# Altium PCB Tactical_LED_Light.PcbDoc
Units mm, origin at the board's own origin, x right, y up, seen from the top; angles counter-clockwise.
Board outline 27 x 24 mm, 2 copper layers (Top Layer, Bottom Layer); 28 components, 15 nets, 118 pads, 45 vias.
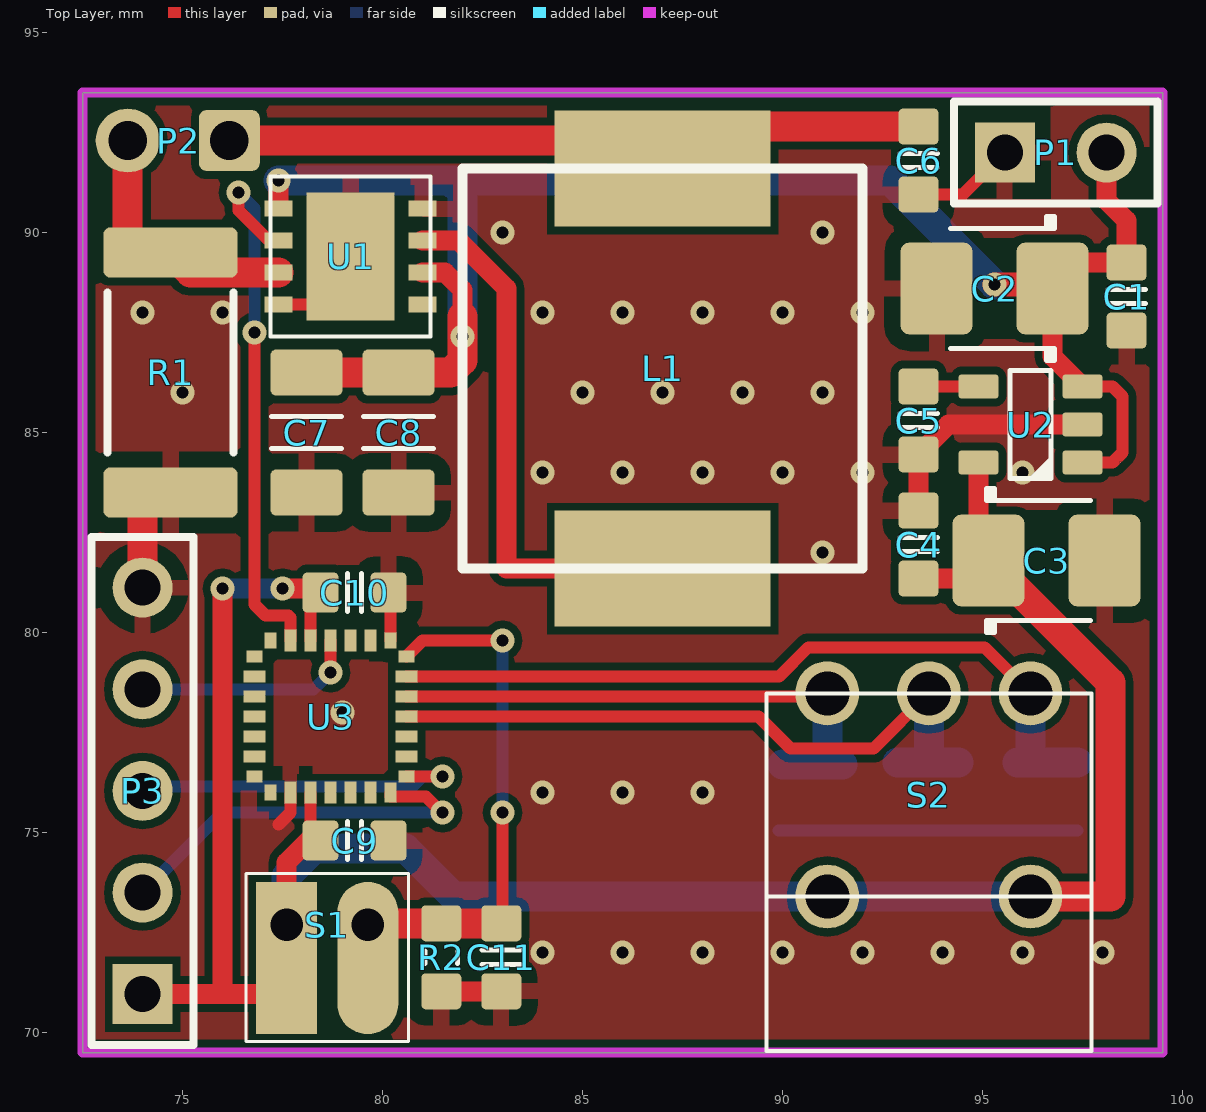
[diagram p0: Top Layer view]
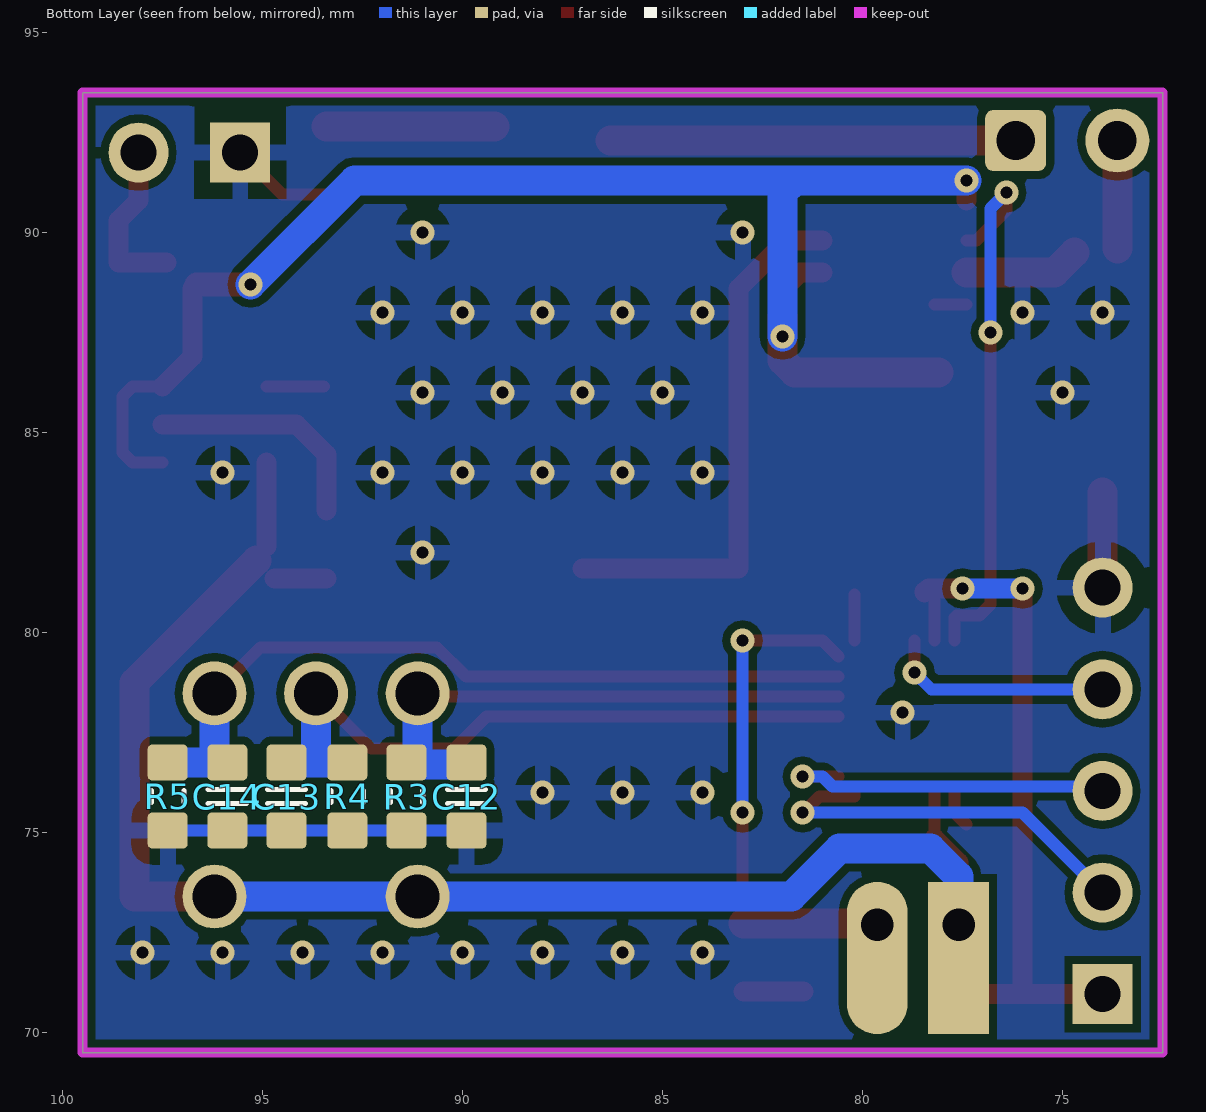
[diagram p1: Bottom Layer view, seen from below]
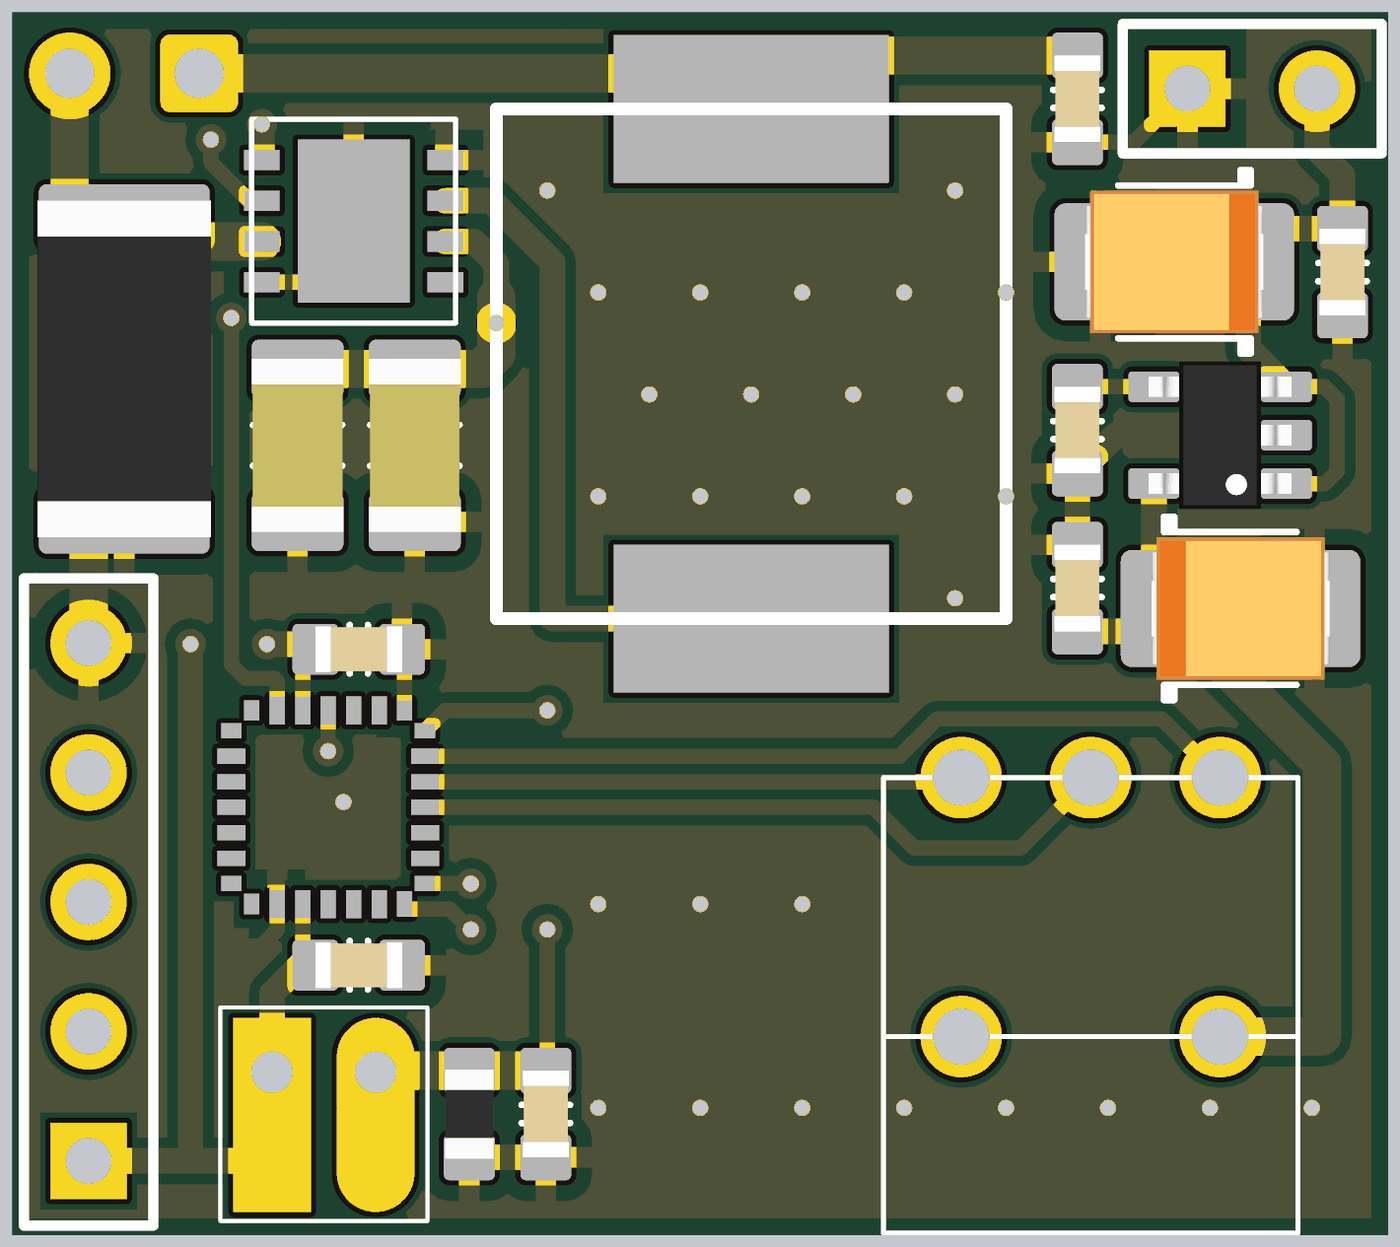
[diagram p2: 3D render of the assembled board from above, using the file's embedded part models]
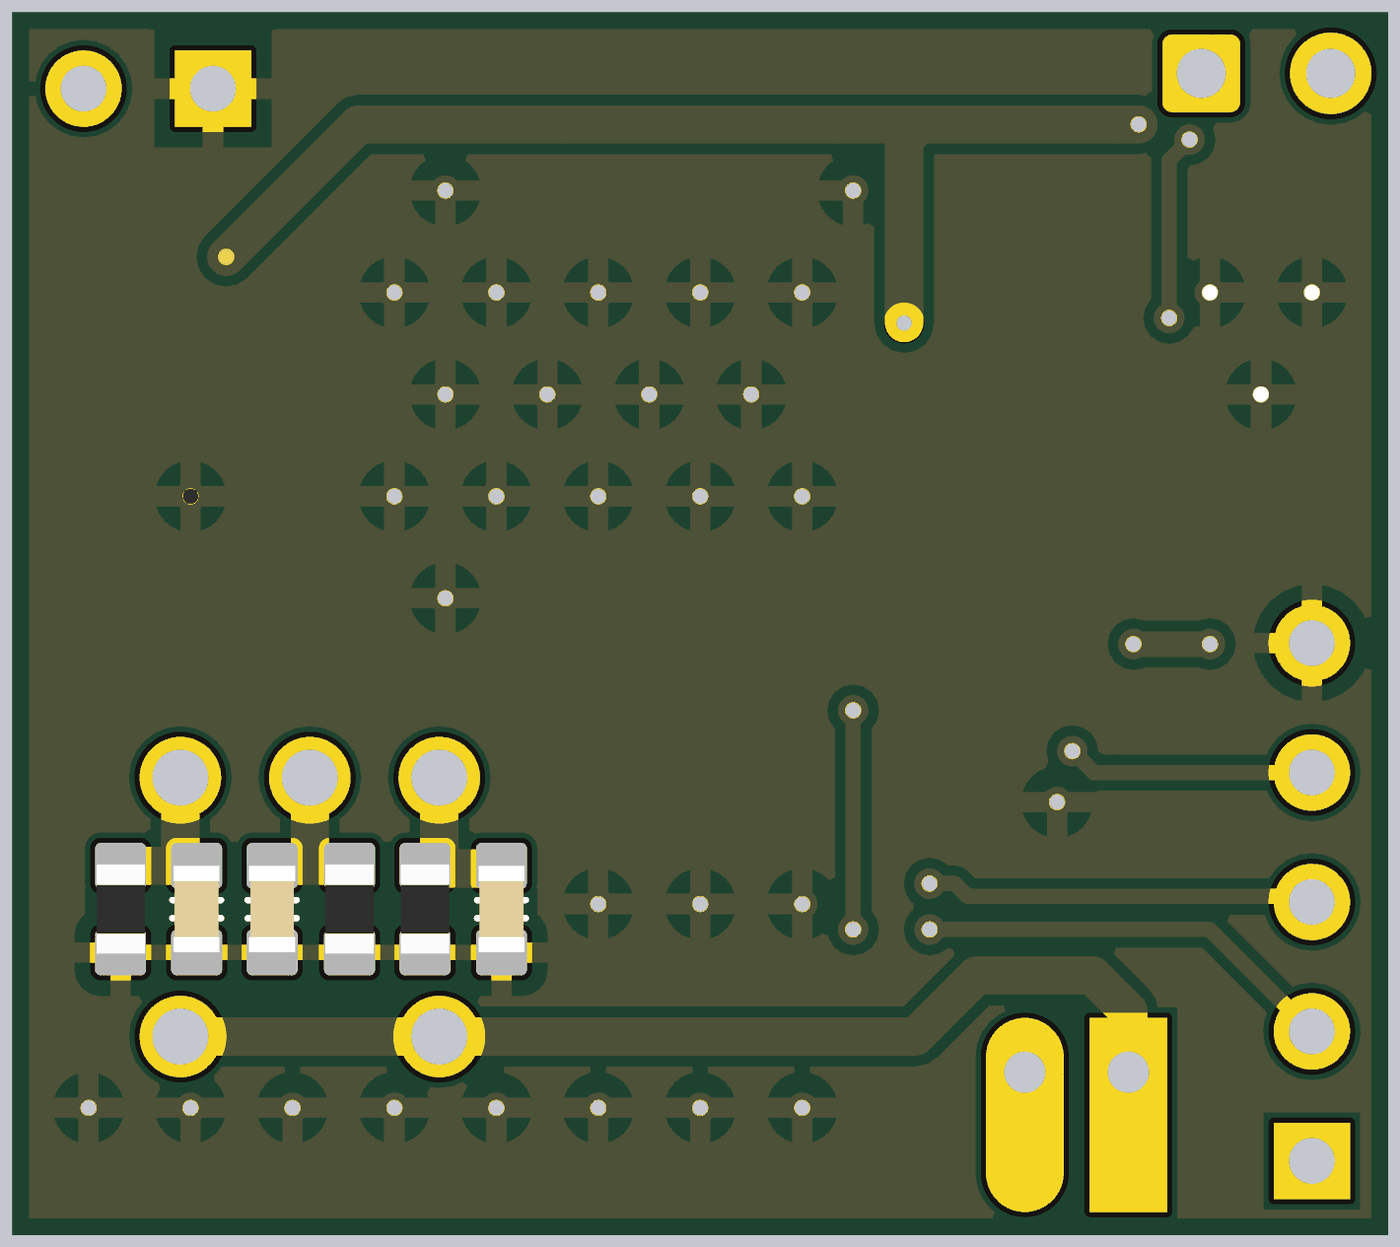
[diagram p3: 3D render of the assembled board from below, using the file's embedded part models]

## Layer stack, top to bottom
Top Solder: solder mask 0.0102, Solder Resist, Dk 3.5
Top Layer: signal copper 0.0356
Dielectric 1: dielectric 0.32, FR-4, Dk 4.8
Bottom Layer: signal copper 0.0356
Bottom Solder: solder mask 0.0102, Solder Resist, Dk 3.5

## Board outline
72.5,69.5 99.5,69.5 99.5,93.5 72.5,93.5

## Design rules (kind name [scope] priority, off if disabled: settings)
Clearance [All] p1: gap=0.2
PolygonConnect PolygonConnect_1 [IsVia] p1: connectstyle=Direct reliefconductorwidth=0.254 reliefentries=4 polygonreliefangle="90 Angle" airgapwidth=0.254
PolygonConnect [All] p2: connectstyle=Relief reliefconductorwidth=0.4 reliefentries=4 polygonreliefangle="90 Angle" airgapwidth=0.4
RoutingVias [All] p1: holewidth=0.3 width=0.6 viastyle="Through Hole" minholewidth=0.3 minwidth=0.6 maxholewidth=0.3 maxwidth=0.6
SolderMaskExpansion [All] p1: expansion=0.102
Width [All] p1: maxlimit=1 minlimit=0.3 preferedwidth=0.5
30 further rules are at their usual default settings.

## Components (designator, comment, footprint, x,y, rotation, side; value= is the part's Value field where it differs from the comment)
C1 "Cap" CAPC1608X90N 98.6,88.4 r90 top
C2 "Cap Pol2" CAPMP3528X210N 95.3,88.6 r180 top
C3 "Cap Pol2" CAPMP3528X210N 96.6,81.8 r0 top
C4 "Cap" CAPC1608X90N 93.4,82.2 r270 top
C5 "Cap" CAPC1608X90N 93.4,85.3 r90 top
C6 "Cap" CAPC1608X90N 93.4,91.8 r90 top
C7 "10µF" CAPC3216X100N 78.1,85 r270 top
C8 "10µF" CAPC3216X100N 80.4,85 r270 top
C9 "Cap" CAPC1608X90N 79.3,74.8 r180 top
C10 "Cap" CAPC1608X90N 79.3,81 r180 top
C11 "Cap" CAPC1608X90N 82.97,71.88 r90 top
C12 "Cap" CAPC1608X90N 89.9,75.9 r90 bottom
C13 "Cap" CAPC1608X90N 94.4,75.9 r90 bottom
C14 "Cap" CAPC1608X90N 95.88,75.9 r90 bottom
L1 "Inductor" IND_CRDH123 87,81.6 r180 top
P1 "Power" HDR1X2#1 95.56,92 r0 top
P2 "LED" HDR_1x2 74.9,92.3 r270 top
P3 "SWD" HDR1X5 74,70.96 r90 top
R1 "Res2" RESC6332X70N 74.7,86.5 r90 top
R2 "Res2" RESC1608X55N 81.47,71.88 r90 top
R3 "Res2" RESC1608X55N 91.4,75.9 r90 bottom
R4 "Res2" RESC1608X55N 92.88,75.9 r90 bottom
R5 "Res2" RESC1608X55N 97.372,75.9 r90 bottom
S1 "SW-PB" HDR1X2#2 77.346,72.7 r0 top
S2 "3-Pos Switch" TSSM1032C3 91.12,73.4 r90 top
U1 "LED2001" LED2001 77.4,90.6 r0 top
U2 "NCP551SN33" SOT23-5 96.2,85.2 r180 top
U3 "STM32f031G4U" Quad28 75.7,79 r270 top

## Footprints (in the part's own frame and the unit in brackets; to place one, negate y for a bottom-side part, rotate by r counter-clockwise, add the part's x,y. Pads: shape width x height; smd on the part's side, far side on the other; paste and mask are expansions set on the pad)
CAPC1608X90N [mm] "Chip Capacitor, Body 1.6x0.8mm, EIA 0603, IPC Medium Density"
  round 0.254 on Mech15: 0(0,0)
  rrect25% 0.9x1 smd: 1(-0.85,0) 2(0.85,0)
  Top Layer pour cut-out: -0.6,0.5 -0.4,0.7 0.4,0.7 0.6,0.5 0.6,-0.5 0.4,-0.7 -0.4,-0.7 -0.6,-0.5
  silkscreen extent -0.18,-0.48 0.18,0.48, body extent -0.85,-0.45 0.85,0.45, height 0.89
CAPC3216X100N [mm] "Chip Capacitor, Body 3.2x1.6mm, 1.0mm H, EIA 1206, IPC Medium Density"
  round 0.508 on Mech15: 0(0,0)
  rrect25% 1.15x1.8 smd: 1(-1.5,0) 2(1.5,0)
  silkscreen extent -0.4,-0.88 0.4,0.88, body extent -1.7,-0.9 1.7,0.9, height 1
CAPMP3528X210N [mm] "Molded body capacitor, Body 3.5x2.8mm, 1210, IPC Nominal settings"
  round 0.254 on Mech15: 0(0,0)
  rrect25% 1.8x2.3 smd: 1(-1.45,0) 2(1.45,0)
  Top Layer pour cut-out: -0.508,1.27 0.508,1.27 0.508,-1.27 -0.508,-1.27
  silkscreen extent -1.5,-1.8 1.1,1.8, body extent -1.75,-1.4 1.75,1.4, height 2.1
HDR1X2#1 [mm] "Connector; Header; 2 Position"
  rect 1.5x1.5 hole 0.9: 1(0,0)
  round 1.5 hole 0.9: 2(2.54,0)
  silkscreen extent -1.27,-1.27 3.81,1.27
HDR1X2#2 [mm] "Connector; Header; 2 Position"
  rect 1.524x3.81 hole 0.813 copper offset 0,-0.838: 1(0.254,0)
  oval 1.524x3.81 hole 0.813 copper offset 0,-0.838: 2(2.286,0)
  silkscreen extent -0.76,-2.92 3.3,1.27
HDR1X5 [mm] "Connector; Header; 5 Position"
  rect 1.5x1.5 hole 0.9: 1(0,0)
  round 1.5 hole 0.9: 2(2.54,0) 3(5.08,0) 4(7.62,0) 5(10.16,0)
  silkscreen extent -1.27,-1.27 11.43,1.27
HDR_1x2 [mil]
  rrect25% 60x60 hole 38: 1(0,50)
  round 62.99 hole 38: 2(0,-50)
  body extent -20,-20 20,20
IND_CRDH123 [mm] "CDRH125"
  rect 5.4x2.9 smd: 1(0,0) 2(0,-10)
  silkscreen extent -5,-10 5,0
LED2001 [mm] "Led Driver"
  rect 0.7x0.4 smd: 1(0,0) 2(0,-0.8) 3(0,-1.6) 4(0,-2.4) 5(3.6,-2.4) 6(3.6,-1.6) 7(3.6,-0.8) 8(3.6,0)
  rect 2.2x3.2 smd: 9(1.8,-1.2)
  silkscreen extent -0.2,-3.2 3.8,0.8
Quad28 [mm]
  rect 0.4x0.3 smd: 1(-0.8,4.5) 7(-0.8,1.5) 15(3,1.5)
  rect 0.55x0.3 smd: 2(-0.8,4) 3(-0.8,3.5) 4(-0.8,3) 5(-0.8,2.5) 6(-0.8,2) 16(3,2) 17(3,2.5) 18(3,3) 19(3,3.5) 20(3,4)
  rect 0.3x0.4 smd: 8(-0.4,1.1) 14(2.6,1.1) 22(2.6,4.9) 28(-0.4,4.9)
  rect 0.3x0.55 smd: 9(0.1,1.1) 10(0.6,1.1) 11(1.1,1.1) 12(1.6,1.1) 13(2.1,1.1) 23(2.1,4.9) 24(1.6,4.9) 25(1.1,4.9) 26(0.6,4.9) 27(0.1,4.9)
  rect 0.5x0.3 smd: 21(3,4.5)
RESC1608X55N [mm] "Chip Resistor, Body 1.6x0.8mm, EIA 0603, IPC Medium Density"
  round 0.254 on Mech15: 0(0,0)
  rrect25% 0.9x1 smd: 1(-0.85,0) 2(0.85,0)
  Top Layer pour cut-out: -0.6,0.5 -0.4,0.7 0.4,0.7 0.6,0.5 0.6,-0.5 0.4,-0.7 -0.4,-0.7 -0.6,-0.5
  silkscreen extent -0.15,-0.41 0.15,0.41, body extent -0.87,-0.47 0.88,0.48, height 0.54
RESC6332X70N [mm] "Chip Resistor, Body 6.3x3.2mm, 2512, IPC Medium Density"
  round 1 on Mech15: 0(0,0)
  rrect25% 1.25x3.35 smd: 1(-3,0) 2(3,0)
  silkscreen extent -2,-1.58 2,1.58, body extent -3.3,-1.7 3.3,1.7, height 0.69
SOT23-5 [mm]
  round 0.5 on Mech15: 0(0,0)
  rrect25% 1x0.6 smd: 1(-1.3,0.95) 2(-1.3,0) 3(-1.3,-0.95) 4(1.3,-0.95) 5(1.3,0.95)
  silkscreen extent -0.51,-1.35 0.51,1.35, body extent -1.4,-1.45 1.4,1.45, height 1.44
TSSM1032C3 [mm] "3 pos switch horizontal ON-OFF-ON"
  round 1.6 hole 1.1: 1(0,0) 1(0,-5.08) 2(5.08,0) 3(5.08,-2.54) 4(5.08,-5.08)
  silkscreen extent -3.86,-6.6 5.08,1.52

## Part data
C1 C4 C5 C6 C9 C10 C11 C12 C13 C14: "Capacitor"
C2 C3: "Polarized Capacitor (Axial)"
C7 C8: library part CAPC_10u_1210_50V, "Capacitor SMD Cer 10uF 20% 16V X5R 1210"
L1: "CDRH125NP-100MC"
P1 P2: library part "Header 2", "Header, 2-Pin"
P3: library part "Header 5", "Header, 5-Pin"
R1 R2 R3 R4 R5: "Resistor"
S1: "Switch"
S2: "3 position switch"
U1: "LED Driver 4A"
U3: "UFQFPN28"

## Via types
v1: diameter 0.6, hole 0.3, Top Layer to Bottom Layer, tented both sides, 44 vias
v2: diameter 0.6, hole 0.3, Top Layer to Bottom Layer, 1 vias

## Nets (pads, with @x,y where several pads share a name; then routed paths per layer and width w, separated by ;. In a path a pad name is that pad's centre, name@x,y a point inside that pad or via, vN(x,y) a via of type N, cw(c..) or ccw(c..) an arc to the next point about the centre after c; other vN are vias at no path point)
BTN_ECO: C13.2 R4.2 S2.3 U3.25 | length 17.2
  Top Layer w0.3: U3.25 89.4,77.9 90.2,77.1 92.28,77.1 S2.3
  Bottom Layer w0.75: R4.2 C13.2 ; 93.66,76.79 S2.3
BTN_ON/OFF: C11.2 R2.2 S1.2 U3.28 | length 12.9
  Top Layer w0.3: U3.28 81,79.8 v1(83,79.8) ; C11.2@83,72.76 v1(83,75.5)
  Top Layer w0.75: S1.2@79.662,72.73 R2.2 C11.2
  Bottom Layer w0.3: v1(83,75.5) v1(83,79.8)
BTN_PERM: C14.2 R5.2 S2.4 U3.27 | length 19.3
  Top Layer w0.3: U3.27 89.914,78.9 90.644,79.63 95.05,79.63 S2.4
  Bottom Layer w0.75: C14.2 R5.2 ; C14.2@96.2,77.07 S2.4
BTN_TACTIC: C12.2 R3.2 S2.2 U3.26 | length 13.5
  Top Layer w0.3: U3.26 91.04,78.4 S2.2
  Bottom Layer w0.75: C12.2@90,76.7 R3.2@91.5,76.7 ; R3.2@91.12,77.03 S2.2
DIM: U1.2 U3.6 | length 13.8
  Top Layer w0.3: v1(76.4,91) 76.4,90.555 77.155,89.8 U1.2 ; v1(76.8,87.5) 76.8,80.7 77.075,80.425 77.646,80.425 77.7,80.371 U3.6
  Bottom Layer w0.3: v1(76.4,91) 76.8,90.6 v1(76.8,87.5)
GND: C1.1 C2.2 C3.2 C4.1 C5.1 C6.1 C7.2 C8.2 C9.1 C10.1 C11.1 C12.1 C13.1 C14.1 P1.1 P3.5 R1.1 R2.1 R3.1 R4.1 R5.1 U1.4 U1.8 U1.9 U2.2 U3.1 U3.16 | length 22.6
  Top Layer w0.3: 77.4,75.2 77.7,75.5 U3.16 ; U1.4 U1.9@78.2,88.2 ; U3.1 C10.1@80.2,80.95 ; C6.1 94.51,90.95 P1.1
  Top Layer w0.5: R2.1 C11.1 ; C4.1 C5.1 94.15,85.2 U2.2
  Top Layer w0.75: P3.5 R1.1@74,83.5
  Bottom Layer w0.3: C12.1 R3.1 R4.1 C13.1 C14.1 R5.1
  other v1: 84,72 86,72 88,72 90,72 92,72 94,72 96,72 98,72 84,76 86,76 88,76 79,78 91,82 84,84 86,84 88,84 90,84 92,84 96,84 75,86 85,86 87,86 89,86 91,86 74,88 76,88 84,88 86,88 88,88 90,88 92,88 83,90 91,90
LED+: C6.2 L1.2 P2.1 | length 14.3
  Top Layer w0.75: P2.1 L1.2@86.3,92.3 ; L1.2@89.2,92.65 C6.2
LED-: P2.2 R1.2 U1.3 | length 5.6
  Top Layer w0.75: R1.2@73.63,89.6 P2.2 ; R1.2 75.2,89 U1.3
NetC5_2: C5.2 U2.4 | length 1.4
  Top Layer w0.3: C5.2@93.461,86.15 U2.4
NetL1_1: L1.1 U1.7 | length 13.5
  Top Layer w0.5: U1.7 81.9,89.8 83.1,88.6 83.1,81.6 L1.1
NRST: P3.4 U3.4 | length 5.7
  Top Layer w0.3: v1(78.7,79) U3.4
  Bottom Layer w0.3: P3.4 78.28,78.58 v1(78.7,79)
SWCLK: P3.3 U3.22 | length 8.6
  Top Layer w0.3: U3.22 v1(81.5,76.4)
  Bottom Layer w0.3: P3.3 74,76.15 80.75,76.15 81,76.4 v1(81.5,76.4)
SWDIO: P3.2 U3.21 | length 9.9
  Top Layer w0.3: U3.21 80.2,75.9 81.081,75.9 81.481,75.5 v1(81.5,75.5)
  Bottom Layer w0.3: P3.2 76,75.5 v1(81.5,75.5)
VCC: C3.1 C4.2 C9.2 C10.2 P3.1 S1.1 S2.1 U2.5 U3.5 U3.17 | length 56.1
  Top Layer w0.3: C9.2@78.2,74.85 U3.17 ; U3.5 C10.2@78.2,81
  Top Layer w0.5: P3.1 76,70.96 ; v1(76,81.1) 76,70.96 ; S1.1@77.2,70.96 76,70.96 ; v1(77.5,81.1) C10.2@78.35,81.1 ; S1.1 77.6,74.25 C9.2@78.2,74.85 ; C10.2 C10.2@78.45,81.025 ; C4.2 C3.1@94.7,81.35 ; C3.1@94.9,82.15 U2.5
  Top Layer w0.75: C3.1 98.2,78.75 98.2,73.4 S2.1@96.2,73.4
  Bottom Layer w0.5: v1(76,81.1) v1(77.5,81.1)
  Bottom Layer w0.75: S1.1 77.6,73.9 78.3,74.6 80.575,74.6 81.775,73.4 91.12,73.4 S2.1@96.2,73.4
VIN: C1.2 C2.1 C7.1 C8.1 P1.2 U1.1 U1.6 U2.1 U2.3 | length 42.8
  Top Layer w0.3: U2.1 98.25,84.25 98.5,84.5 98.5,85.9 98.25,86.15 U2.3
  Top Layer w0.5: 77.4,90.8 v1(77.4,91.3) ; U1.6 81.563,89 82,88.563 v2(82,87.4) ; C2.1 96.75,86.9 U2.3 ; C2.1@97.4,89.25 C1.2 98.6,90.3 98.1,90.8 P1.2
  Top Layer w0.6: v1(95.3,88.7) C2.1@96.65,88.7
  Top Layer w0.75: C7.1 C8.1 81.7,86.5 82,86.8 82,87.9
  Bottom Layer w0.75: v1@77.4,91.298 81.702,91.298 ; v2(82,87.4) 82,91 81.702,91.298 ; v1(95.3,88.7) 92.702,91.298 81.702,91.298
pads on no net: C1.0 C2.0 C3.0 C4.0 C5.0 C6.0 C7.0 C8.0 C9.0 C10.0 C11.0 C12.0 C13.0 C14.0 R1.0 R2.0 R3.0 R4.0 R5.0 U1.5 U2.0 U3.2 U3.3 U3.7 U3.8 U3.9 U3.10 U3.11 U3.12 U3.13 U3.14 U3.15 U3.18 U3.19 U3.20 U3.23 U3.24

## Polygon pours and split planes (outlines as drawn)
GND on Top Layer "GND" (solid, pour order 0): 99.5,69.5 99.5,93.5 72.3,93.5 72.5,93.5 72.5,69.5
GND on Bottom Layer "GND" (solid, pour order 2): 99.5,93.5 99.5,69.5 72.5,69.5 72.5,93.5

## Keep-outs
Keep-Out Layer:
  the board outline again, w0.254